# EAGLE board esp32-controller (EAGLE 7.5.0)
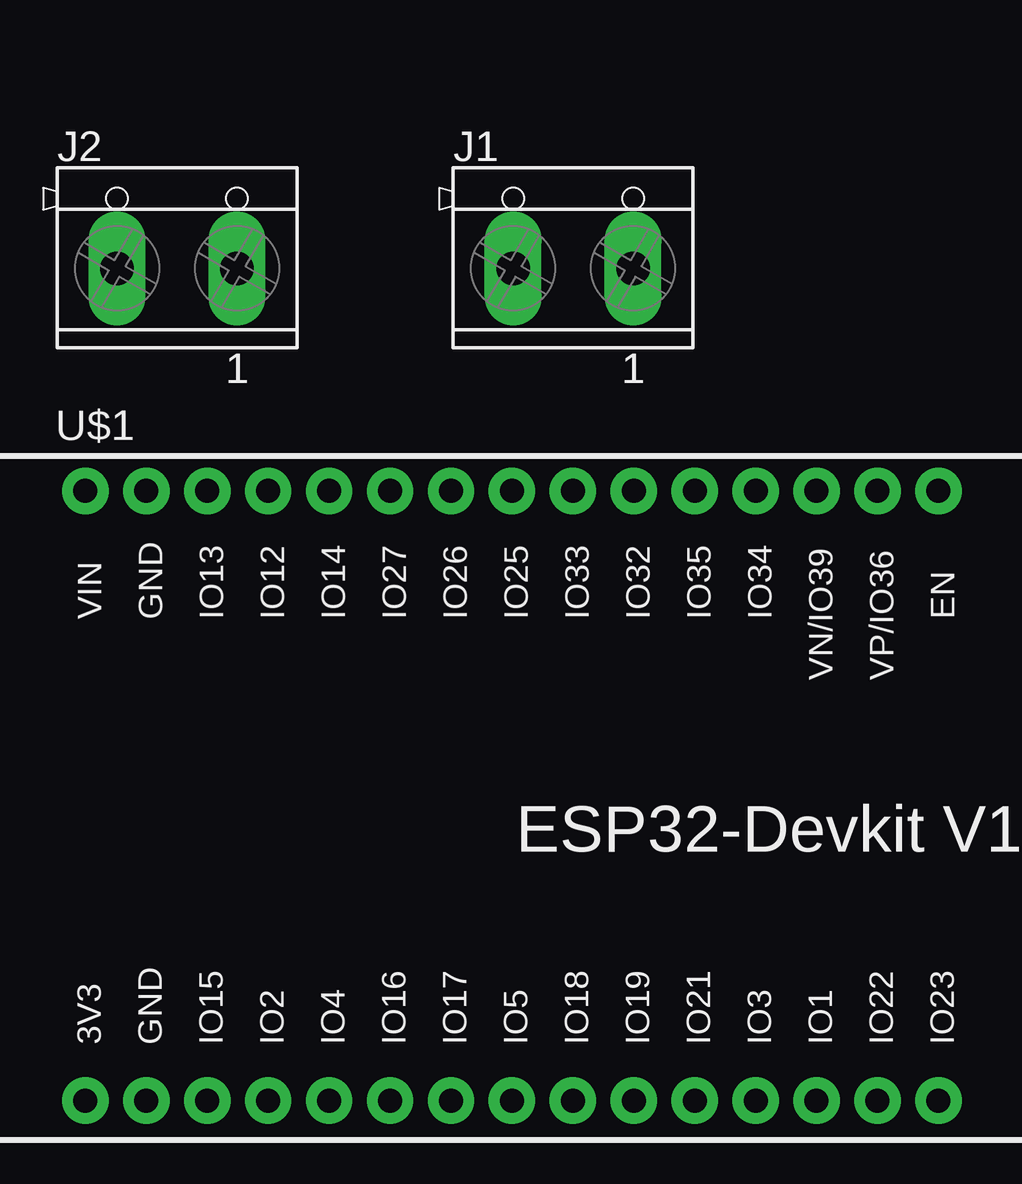
[diagram p0: board, top side]
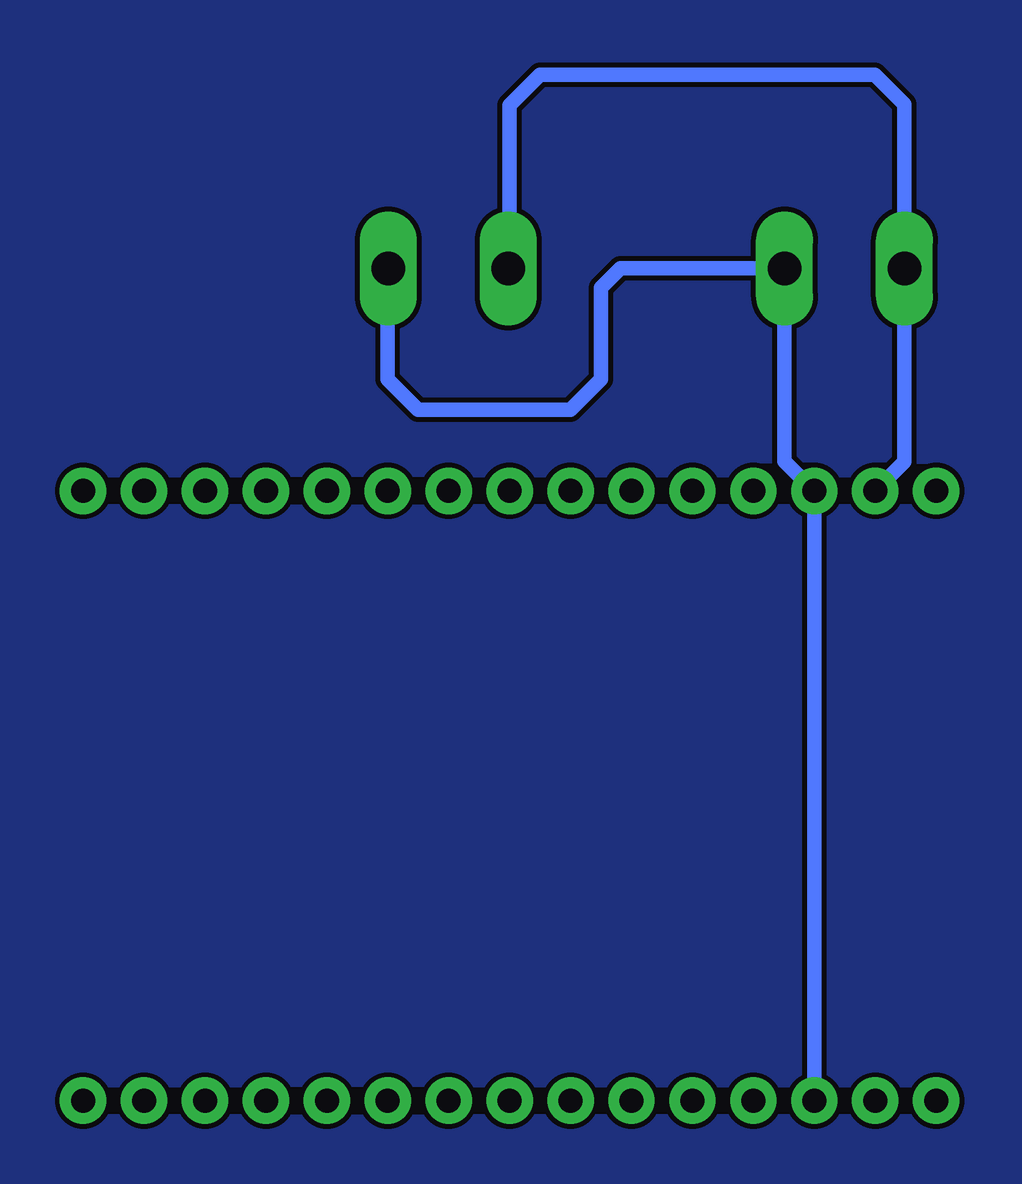
[diagram p1: board, bottom side, seen from below]

No outline drawn. Coordinates in mm, seen from the top.
Copper layers (1*16): Top 0.035mm / dielectric 1.5mm / Bottom 0.035mm
Design rules "default": minimum track width 10mil, minimum drill 24mil, track to track 8mil, track to pad 8mil, pad to pad 8mil, via to via 8mil, smd to smd 8mil, copper to edge 40mil, drill to drill 8mil, minimum pad ring 10mil, minimum via ring 8mil, stop-mask expansion 4mil, vias tented up to drill 0mil, thermal gap 10mil

## Footprints (pad centres in the part's own frame; a part is rotated, then mirrored left to right if it is on the bottom)
TERMINAL_BLOCK_2P_5 = drill 1.4 pad 2.38 long: 1 2.5,-0.45; 2 -2.5,-0.45
ESP32-DEVKITV1 = drill 1 pad 1.93: 3V3 -16.52,-12.27; D1 13.96,-12.27; D2 -8.9,-12.27; D3 11.42,-12.27; D4 -6.36,-12.27; D5 1.26,-12.27; D12 -8.9,13.135; D13 -11.44,13.135; D14 -6.36,13.135; D15 -11.44,-12.27; D16 -3.82,-12.27; D17 -1.28,-12.27; D18 3.8,-12.27; D19 6.34,-12.27; D21 8.88,-12.27; D22 16.5,-12.27; D23 19.04,-12.27; D25 1.26,13.135; D26 -1.28,13.135; D27 -3.82,13.135; D32 6.34,13.135; D33 3.8,13.135; D34 11.42,13.135; D35 8.88,13.135; D36 16.5,13.135; D39 13.96,13.135; EN 19.04,13.135; GND@1 -13.98,13.135; GND@2 -13.98,-12.27; VIN -16.52,13.135

## Placement (x,y rotation side)
J1  CON_TERMINAL_BLOCK_02-5MM  [TERMINAL_BLOCK_2P_5]  59.69,49.53 0 top
J2  CON_TERMINAL_BLOCK_02-5MM  [TERMINAL_BLOCK_2P_5]  43.18,49.53 0 top
U$1  ESP32DEVKITV1  [ESP32-DEVKITV1]  55.88,26.67 0 top

## Library data of the parts
J1 J2 = tblok
U$1 = esp32-devkit

## Nets
GND: J1.1 J2.1 U$1.D13 U$1.D15
HV: J1.2 J2.2 U$1.GND@1
LV: U$1.GND@2
LV1: U$1.D18
LV2: U$1.D16
LV3: U$1.D4
LV4: U$1.D2

## Tracks (layer width: path | path; a pad name or v marks a point on that pad's centre or on a via)
GND
  Bottom 0.61: J1.1 62.23,49.04 62.23,44.45 60.96,43.18 54.61,43.18 53.34,44.45 53.34,48.26 52.52,49.08 J2.1 45.68,41.05 U$1.D13 U$1.D15
HV
  Bottom 0.61: U$1.GND@1 40.68,41.02 J2.2 40.68,55.92 41.91,57.15 55.88,57.15 57.15,55.88 57.15,49.12 J1.2
N$1
  pour Bottom: 13.97,64.77 87.63,64.77 87.63,3.81 13.97,3.81